# Altium PCB PM_TEST - copia.PcbDoc
Units mm, origin at the board's own origin, x right, y up, seen from the top; angles counter-clockwise.
Board outline 65 x 80.04 mm, 2 copper layers (Top Layer, Bottom Layer), stack 0.325 mm thick; 73 components, 44 nets, 205 pads, 217 vias.
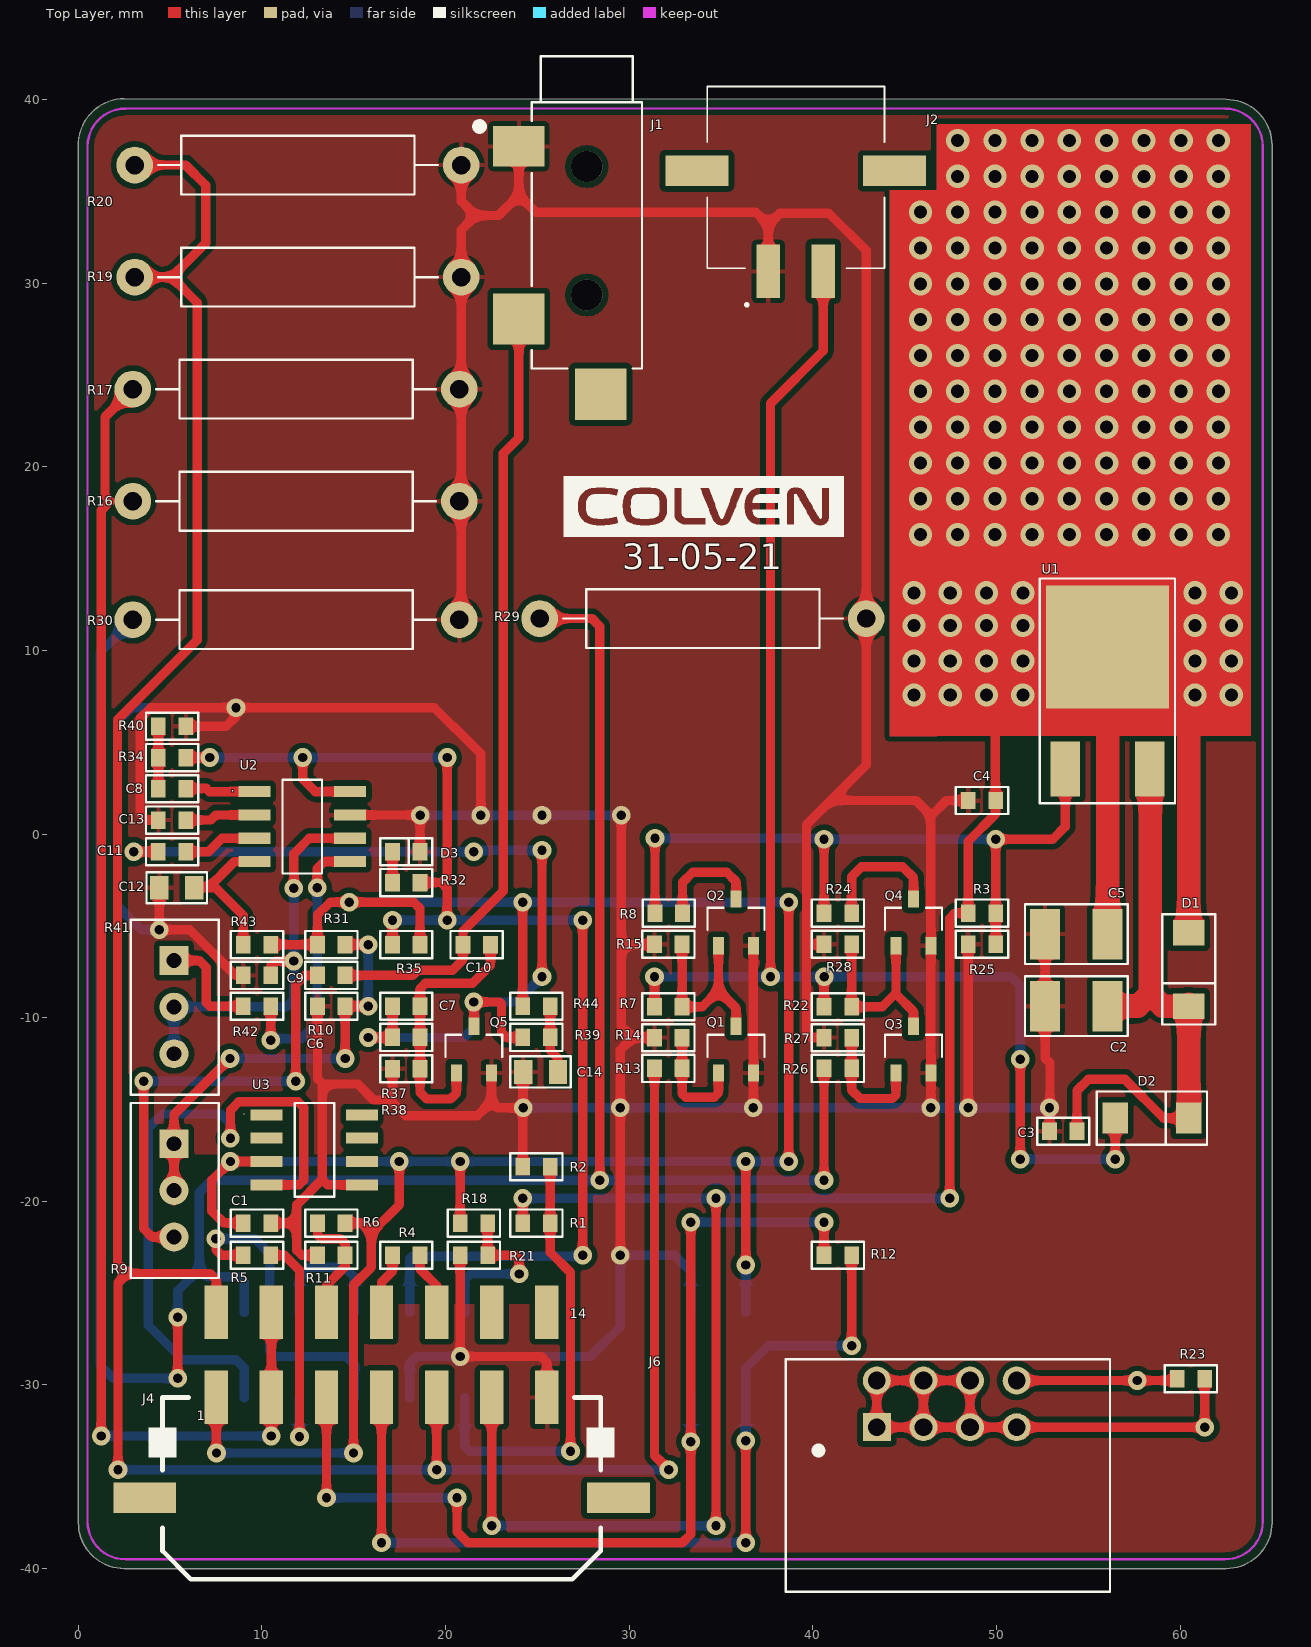
[diagram p0: Top Layer view]
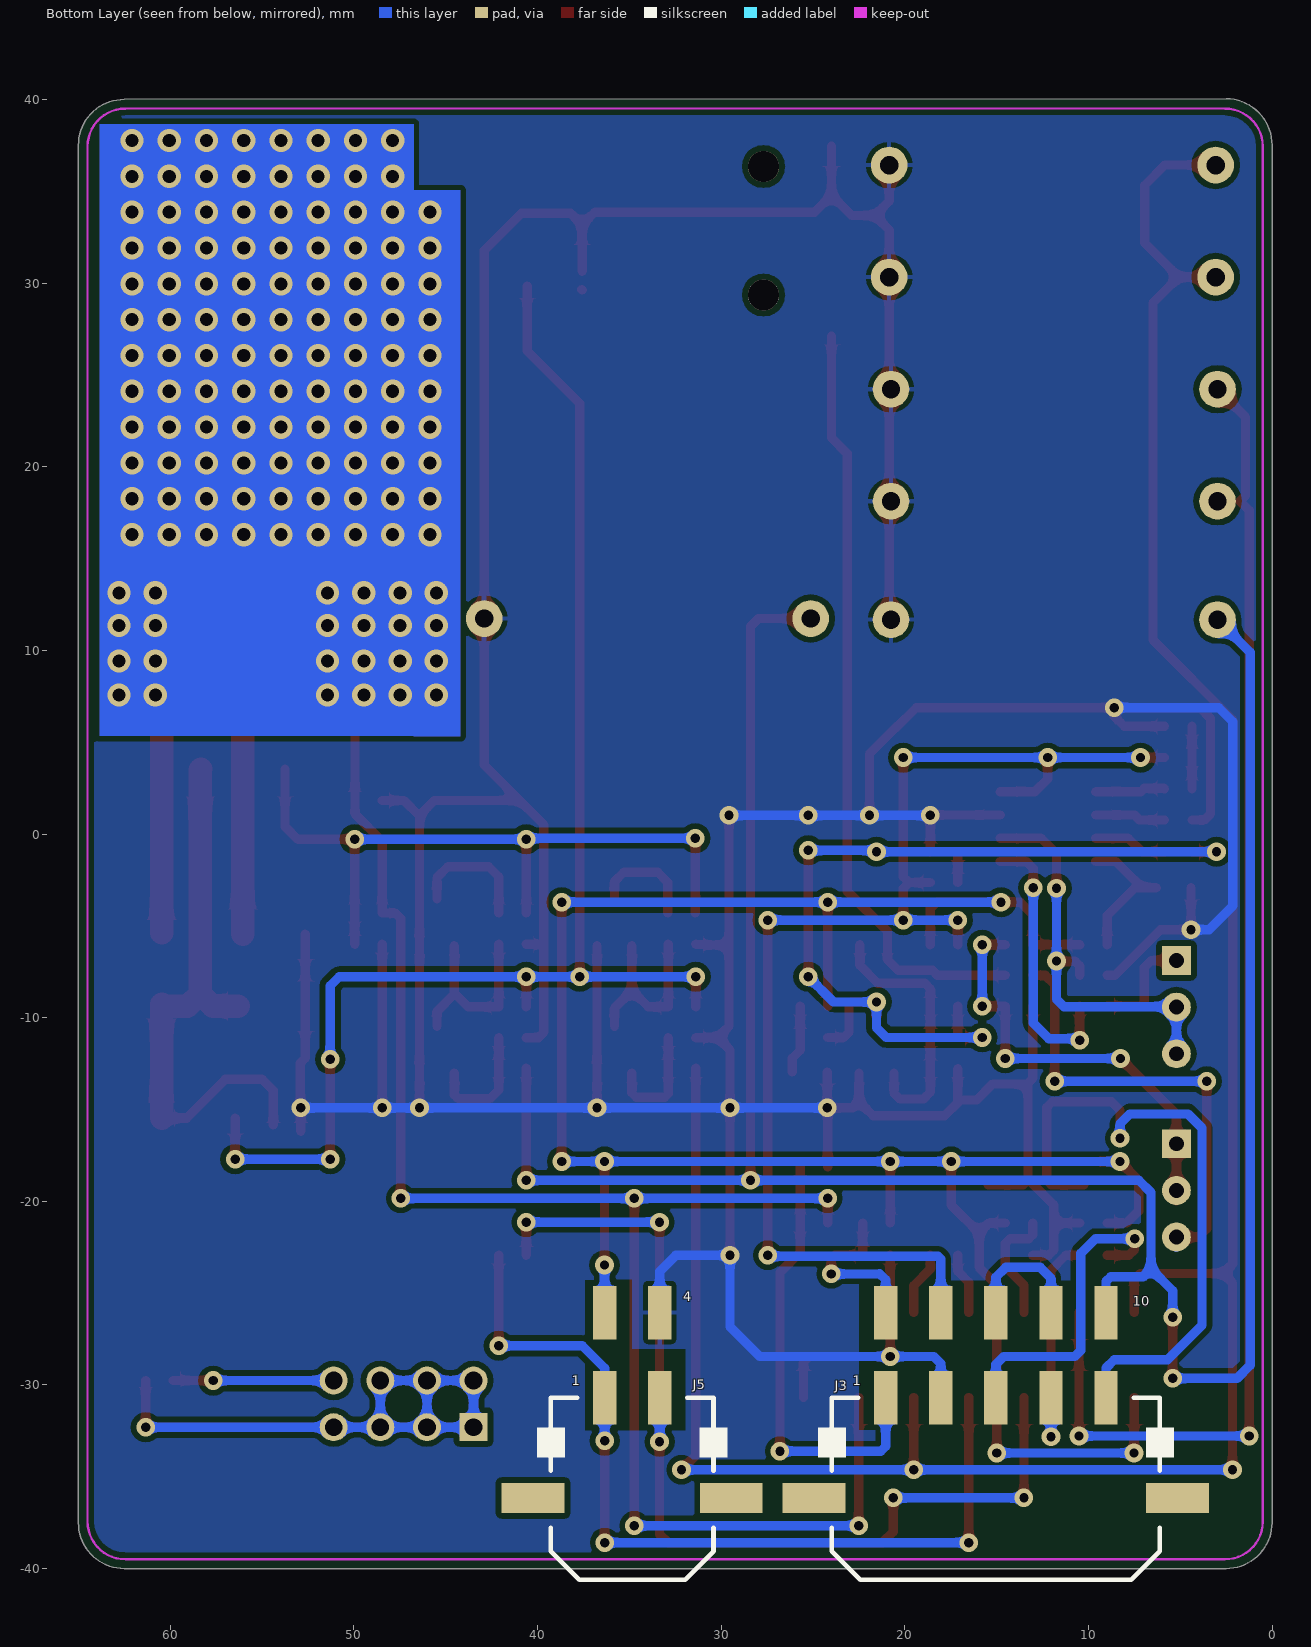
[diagram p1: Bottom Layer view, seen from below]

## Layer stack, top to bottom
Top Solder: solder mask 0.0102, Solder Resist, Dk 3.5
Top Layer: signal copper 0.0356
Dielectric 1: core 0.254, FR-4, Dk 4.2
Bottom Layer: signal copper 0.0356
Solder Side: solder mask 0.0102, Solder Resist, Dk 3.5

## Board outline
2.5,-39.995 cw(c2.5,-37.495) 0,-37.495 0,37.505 cw(c2.522,37.527) 2.5,40.05 62.5,40.005 cw(c62.5,37.505) 65,37.505 65,-37.495 cw(c62.5,-37.495) 62.5,-39.995

## Design rules (kind name [scope] priority, off if disabled: settings)
Clearance ClearancePWRA [OnLayer('PWRS')] p1: gap=0.381 ignorepadtopadclearanceinfootprint=FALSE except(0: Arc-Hole Track-Hole SMDPad-Hole THPad-Hole Via-Hole Fill-Hole Poly-Hole Region-Hole Text-Hole)
Clearance ClearancePours [InPolygon] p2: gap=0.305 ignorepadtopadclearanceinfootprint=FALSE except(0: Arc-Hole Track-Hole SMDPad-Hole THPad-Hole Via-Hole Fill-Hole Poly-Hole Region-Hole Text-Hole)
Clearance Ant2Gnd [InNet('ANT_GPS') Or InNet('ANT_GSM') Or InNet('RF_GPS') vs InNet('GND')] p3: gap=0.254 ignorepadtopadclearanceinfootprint=FALSE except(0: Arc-Hole Track-Hole SMDPad-Hole THPad-Hole Via-Hole Fill-Hole Poly-Hole Region-Hole Text-Hole)
Clearance [All] p4: gap=0.127 ignorepadtopadclearanceinfootprint=FALSE except(0: Arc-Hole Track-Hole SMDPad-Hole THPad-Hole Via-Hole Fill-Hole Poly-Hole Region-Hole Text-Hole)
ComponentClearance [All] p1: gap=0.2 collisioncheckmode=3 verticalgap=0.2 showdistances=FALSE
DiffPairsRouting [All] p1: maxlimit=0.508 minlimit=0.152 mostfreqgap=0.254 toplayer_minwidth=0.381 toplayer_maxwidth=0.381 toplayer_prefwidth=0.381 bottomlayer_minwidth=0.381 bottomlayer_maxwidth=0.381 bottomlayer_prefwidth=0.381 maxuncoupledlength=12.7
HoleSize [All] p1: absolutevalues=TRUE maxlimit=3.5 minlimit=0.025 maxpercent=80.000 minpercent=20.000
MinimumSolderMaskSliver LOGO_GESTYA [HasFootprint('LOGO_GESTYA_15mm_TOPSOLDER') or HasFootprint('HELLFISH_BOTTOMSOLDER')] p1: minsoldermaskwidth=0
MinimumSolderMaskSliver POWER33 [HasFootprint('POWER33')] p2: minsoldermaskwidth=0.025
MinimumSolderMaskSliver CASE_517AJ [HasFootprint('CASE_517AJ')] p3: minsoldermaskwidth=0.025
MinimumSolderMaskSliver LGA16 [HasFootprint('LGA16')] p4: minsoldermaskwidth=0.025
MinimumSolderMaskSliver [All] p5: minsoldermaskwidth=0.051
PlaneConnect IsVia [IsVia] p1: planeconnectstyle=Direct reliefexpansion=0.508 reliefentries=4 reliefconductorwidth=0.254 reliefairgap=0.254
PlaneConnect [All] p2: planeconnectstyle=Relief reliefexpansion=0.508 reliefentries=4 reliefconductorwidth=0.254 reliefairgap=0.254
PolygonConnect PolygonPadBat [HasFootprint('BHX1-1632-PC')] p1: connectstyle=Direct reliefconductorwidth=0.254 reliefentries=4 polygonreliefangle="90 Angle" airgapwidth=0.254
PolygonConnect Polygon2Via [IsVia] p2: connectstyle=Direct reliefconductorwidth=0.254 reliefentries=4 polygonreliefangle="90 Angle" airgapwidth=0.254
PolygonConnect PolygonPWRS [OnLayer('PWRS')] p3: connectstyle=Direct reliefconductorwidth=0.254 reliefentries=4 polygonreliefangle="90 Angle" airgapwidth=0.254
PolygonConnect PolygonVMAIN [InNet('VMAIN')] p4: connectstyle=Direct reliefconductorwidth=0.254 reliefentries=4 polygonreliefangle="90 Angle" airgapwidth=0.254
PolygonConnect PolygonVGPIO [All vs InNet('VGPIO')] p5: connectstyle=Direct reliefconductorwidth=0.254 reliefentries=4 polygonreliefangle="90 Angle" airgapwidth=0.254
PolygonConnect PolygonFuente [All vs InNet('NetC49_2') or InNet('5V_MAIN') or InNet('3V3_MCU')] p6: connectstyle=Direct reliefconductorwidth=0.254 reliefentries=4 polygonreliefangle="90 Angle" airgapwidth=0.254
PolygonConnect [All] p7: connectstyle=Relief reliefconductorwidth=0.254 reliefentries=4 polygonreliefangle="90 Angle" airgapwidth=0.254
RoutingVias [All] p1: holewidth=0.254 width=0.508 viastyle="Through Hole" minholewidth=0.254 minwidth=0.508 maxholewidth=0.254 maxwidth=0.508
ShortCircuit xL865 [HasFootprint('xL865') vs IsFill] p1: allowed=TRUE
ShortCircuit [All] p2: allowed=FALSE
SilkToSilkClearance [All] p1: silktosilkclearance=0.091
SilkToSolderMaskClearance SilkscreenOverComponentPads [IsPad] p1: minsilkscreentomaskgap=0.072 clearancetoexposedcopper=TRUE
SolderMaskExpansion [All] p1: expansion=0.102
Width [All] p1: maxlimit=1.27 minlimit=0.254 preferedwidth=0.508
Width PWRS [All] p2: maxlimit=1.524 minlimit=0.254 preferedwidth=1
Width Antenas [InNet('ANT_GPS') Or InNet('ANT_GSM') Or InNet('RF_GPS')] p3: maxlimit=0.889 minlimit=0.508 preferedwidth=0.889
22 further rules are at their usual default settings.

## Components (designator, comment, footprint, x,y, rotation, side; value= is the part's Value field where it differs from the comment)
C1 "100nF" 0603 9.728,-21.184 r0 top
C2 "10uF 50V" 1210 54.345,-9.373 r180 top
C3 "100nF" 0603 53.633,-16.182 r0 top
C4 "100nF" 0603 49.206,1.829 r0 top
C5 "10uF 50V" 1210 54.345,-5.451 r180 top
C6 "1uF 50V" 0603 13.775,-9.373 r0 top
C7 "100pF" 0603 17.856,-9.373 r180 top
C8 "1uF 50V" 0603 5.105,2.464 r0 top
C9 "100nF" 0603 9.728,-7.696 r180 top
C10 "10nF" 0603 21.692,-6.02 r0 top
C11 "1uF 50V" 0603 5.105,-0.965 r0 top
C12 "33uF 20V" 0805 5.359,-2.921 r0 top
C13 "220nF 16V" 0603 5.105,0.762 r180 top
C14 "10uF 10V" 0805 25.171,-12.954 r0 top
D1 "S1M" SMAK 60.464,-7.373 r270 top
D2 "S1M" SMAK 58.464,-15.469 r0 top
D3 "AZUL" LED0603_B 17.856,-0.965 r0 top
J1 "MJ-3523-SMT-TR" MJ-3523-SMT-TR 39.101,28.557 r90 top
J2 "MOLEX_0436500212" 0436500212 39.068,35.678 r180 top
J3 "MOLEX_043045-1009" 043045-1009 21.037,-30.688 r180 bottom locked
J4 "MOLEX_043045-1409" 043045-1409 7.51,-30.678 r0 top locked
J5 "MOLEX_043045-0409" 043045-0409 33.342,-30.688 r180 bottom locked
J6 "75867-132LF" 75867-132LF 43.477,-32.3 r0 top
Q1 "BC817" SOT23 35.809,-11.735 r0 top
Q2 "BC817" SOT23 35.809,-4.811 r0 top
Q3 "BC817" SOT23 45.475,-11.735 r0 top
Q4 "BC817" SOT23 45.475,-4.811 r0 top
Q5 "BC817" SOT23 21.539,-11.735 r0 top
R1 "100K 1%" 0603 24.943,-21.184 r180 top
R2 "100K 1%" 0603 24.943,-18.11 r0 top
R3 "240R 1%" 0603 49.206,-4.303 r180 top
R4 "10K 1%" 0603 17.856,-22.936 r180 top
R5 "10K 1%" 0603 9.728,-22.936 r180 top
R6 "100K 1%" 0603 13.775,-21.184 r0 top
R7 "10K 1%" 0603 32.126,-9.408 r0 top
R8 "13K3 1%" 0603 32.151,-4.303 r180 top
R9 "10K" 3386W 7.647,-14.641 r270 top
R10 "5K 0.1%" 0603 13.775,-7.696 r180 top
R11 "100K 1%" 0603 13.775,-22.936 r0 top
R12 "100R" 0603 41.356,-22.936 r0 top
R13 "10K 1%" 0603 32.126,-12.761 r180 top
R14 "10K 1%" 0603 32.126,-11.084 r180 top
R15 "10K 1%" 0603 32.126,-6.004 r180 top
R16 "120R 2W" RES700 20.748,18.124 r180 top
R17 "120R 2W" RES700 20.748,24.226 r180 top
R18 "100K 1%" 0603 21.539,-21.184 r180 top
R19 "120R 2W" RES700 20.848,30.328 r180 top
R20 "120R 2W" RES700 20.848,36.429 r180 top
R21 "100K 1%" 0603 21.539,-22.936 r0 top
R22 "10K 1%" 0603 41.356,-9.408 r0 top
R23 "10K 1%" 0603 60.583,-29.658 r180 top
R24 "3K 1%" 0603 41.356,-4.303 r180 top
R25 "6K49 1%" 0603 49.206,-6.004 r0 top
R26 "10K 1%" 0603 41.356,-12.761 r180 top
R27 "10K 1%" 0603 41.356,-11.084 r180 top
R28 "10K 1%" 0603 41.356,-6.004 r180 top
R29 "120R 2W" RES700 42.901,11.735 r180 top
R30 "120R 2W" RES700 20.748,11.675 r180 top
R31 "1K 1%" 0603 13.775,-6.02 r180 top
R32 "1K 1%" 0603 17.856,-2.642 r0 top
R34 "5K1 1%" 0603 5.105,4.166 r0 top
R35 "10K 1%" 0603 17.856,-6.02 r180 top
R37 "360K 1%" 0603 17.856,-11.074 r180 top
R38 "110K 1%" 0603 17.856,-12.776 r0 top
R39 "10K 1%" 0603 24.944,-11.074 r180 top
R40 "390R 1%" 0603 5.105,5.867 r180 top
R41 "10K" 3386W 7.647,-4.658 r270 top
R42 "5K1 1%" 0603 9.728,-9.373 r0 top
R43 "100R" 0603 9.728,-6.02 r0 top
R44 "1K 1%" 0603 24.944,-9.373 r0 top
U1 "LM317MBDTRKG" DPAK 53.746,3.535 r0 top
U2 "LM567C" SOIC8 12.192,0.406 r0 top
U3 "DS1822Z+T&R" SOIC8 12.852,-17.196 r0 top

## Footprints (in the part's own frame and the unit in brackets; to place one, negate y for a bottom-side part, rotate by r counter-clockwise, add the part's x,y. Pads: shape width x height; smd on the part's side, far side on the other; paste and mask are expansions set on the pad)
0603 [mm] "Chip Resistor, 2-Leads, Body 0,6\"x0,3\" - 1,6x0,9mm, IPC High Density"
  rect 0.8x0.95 smd: 1(-0.75,0) 2(0.75,0)
  silkscreen extent -1.42,-0.74 1.42,0.74, body extent -0.8,-0.41 0.8,0.39, height 0.44
0805 [mm] "Chip Resistor, 2-Leads, Body 0,8\"x0,5\" - 2,0x1,3mm, IPC High Density"
  rect 1x1.3 smd: 1(-0.95,0) 2(0.95,0)
  silkscreen extent -1.65,-0.85 1.65,0.85, body extent -1,-0.62 1,0.63, height 0.39
1210 [mil]
  rect 64x108 smd: 1(-67,0) 2(67,0)
  silkscreen extent -110,-64 110,64, body extent -64,-54 62,54, height 20
3386W [mil]
  rect 62x62 hole 32: 1(87.6,-96.06)
  round 62 hole 32: 2(187.6,-96.06) 3(287.6,-96.06)
  silkscreen extent 0,-189 375,0, body extent 1,-190 376,0, height 375
043045-0409 [mm]
  rect 3.43x1.65 smd: 0(-6.895,-5.47) 0(3.895,-5.47)
  rect 1.27x2.92 smd: 1(-3,0) 2(-3,4.63) 3(0,0) 4(0,4.63)
  silkscreen extent -6.68,-9.91 3.68,0, body extent -8.33,-10.06 5.32,5.34, height 8.83
043045-1009 [mm]
  rect 3.43x1.65 smd: 0(-3.895,-5.47) 0(15.895,-5.47)
  rect 1.27x2.92 smd: 1(0,0) 2(0,4.63) 3(3,0) 4(3,4.63) 5(6,0) 6(6,4.63) 7(9,0) 8(9,4.63) 9(12,0) 10(12,4.63)
  silkscreen extent -3.68,-9.91 15.68,0, body extent -5.32,-10.06 17.32,5.34, height 8.83
043045-1409 [mm]
  rect 3.43x1.65 smd: 0(-3.895,-5.47) 0(21.895,-5.47)
  rect 1.27x2.92 smd: 1(0,0) 2(0,4.63) 3(3,0) 4(3,4.63) 5(6,0) 6(6,4.63) 7(9,0) 8(9,4.63) 9(12,0) 10(12,4.63) 11(15,0) 12(15,4.63) 13(18,0) 14(18,4.63)
  silkscreen extent -3.68,-9.91 21.68,0, body extent -5.34,-10.07 23.31,5.33, height 8.73
75867-132LF [mil]
  rect 60x60 hole 38: 1(0,0)
  round 60 hole 38: 2(0,100) 3(100,0) 4(100,100) 5(200,0) 6(200,100) 7(300,0) 8(300,100)
  silkscreen extent -195,-352 500,146, body extent -189,-440 494,110, height 373
0436500212 [mm]
  rect 1.27x2.92 smd: 1(1.5,5.035) 2(-1.5,5.035)
  rect 3.43x1.65 smd: MP1(5.385,-0.435) MP2(-5.385,-0.435)
  silkscreen extent -4.82,-5.03 4.82,6.88, body extent -6.82,-5.08 6.83,5.66, height 5.64
DPAK [mm]
  rect 1.6x3 smd: 1(0,0) 3(4.6,0)
  rect 6.7x6.7 smd: 2(2.3,6.65)
  silkscreen extent -1.4,-1.85 5.97,10.38, body extent -0.98,-0.85 5.56,9.08, height 2.36
LED0603_B [mm]
  rect 0.8x0.95 smd: 1(-0.75,0) 2(0.75,0)
  silkscreen extent -1.42,-0.74 1.42,0.74, body extent -0.81,-0.41 0.81,0.39, height 0.6
MJ-3523-SMT-TR [mm] "MJ-3523-SMT-TR"
  rect 2.2x2.8 smd: 1(8.892,15.113)
  rect 2.8x2.8 smd: 2(-0.508,15.113) 10(-4.608,10.663)
  round 1.7 hole 1.7 unplated: ""(0.792,11.413) ""(7.792,11.413)
  silkscreen extent -3.21,8.41 13.79,17.46, body extent -5.18,8.38 13.82,15.87, height 5.1
RES700 [mm]
  round 2 hole 1: 1(0,0) 2(17.78,0)
  silkscreen extent 1.27,-1.6 16.51,1.6, body extent -0.4,-2.62 18.19,2.88, height 5.4
SMAK [mm]
  rect 1.4x1.7 smd: 1(-2,0) 2(2,0)
  silkscreen extent -3,-1.45 3,1.45, body extent -2.59,-1.3 2.61,1.3, height 2.4
SOIC8 [mm]
  rect 1.75x0.6 smd: 1(-2.6,1.905) 2(-2.6,0.635) 3(-2.6,-0.635) 4(-2.6,-1.905) 5(2.6,-1.905) 6(2.6,-0.635) 7(2.6,0.635) 8(2.6,1.905)
  silkscreen extent -1.07,-2.55 1.07,2.55, body extent -3.01,-2.51 3.01,2.49, height 1.75
SOT23 [mm]
  rect 0.6x0.95 smd: 1(-0.95,-1.275) 2(0,1.275) 3(0.95,-1.275)
  silkscreen extent -1.55,-0.4 1.55,0.8, body extent -1.48,-1.53 1.52,1.61, height 1

## Part data
C1 C3 C4 C9: library part CAP0603_100nF_X7R, "CAP0603 100nF 50V X7R", Supplier Part Number 1=490-4779-1-ND, APROBO=EB, CREO=CP, Part Number=CAP0603_100nF_X7R, Supplier 1=Digi-Key
C2 C5: library part CAP1210_10uF_50V_X5R, "CAP1210 10uF 50V X5R 20%", Manufacturer="Taiyo Yuden", Manufacturer Part Number=UMK325BJ106MM-T, Supplier Part Number 1=587-2225-1-ND, CREO=JP, Part Number=CAP1210_10uF_50V_X5R, Supplier 1=Digi-Key
C6 C8 C11: library part CAP0603_1uF_50V_X7R, "CAP0603 1uF 50V X7R", Supplier Part Number 1=587-3247-1-ND, CREO=EB, Part Number=CAP0603_1uF_50V_X7R, Supplier 1=Digi-Key
C7: library part CAP0603_100pF_NP0, "CAP0603 100pF 50V NP0", Manufacturer="Murata Electronics", Manufacturer Part Number=GRM1885C1H101JA01D, Supplier Part Number 1=490-1427-1-ND, CREO=EB, Part Number=CAP0603_100pF_NP0, Supplier 1=Digi-Key
C10: library part CAP0603_10nF_X7R, "CAP0603 10nF 50V X7R", Supplier Part Number 1=490-4778-1-ND, CREO=EB, Part Number=CAP0603_10nF_X7R, Supplier 1=Digi-Key
C12: library part CAP0805_33uF_10V_X5R, "CAP0805 33uF 10V X5R 20%", Manufacturer="TDK Corporation", Manufacturer Part Number=C2012X5R1A336M125AC, Supplier Part Number 1=445-8238-1-ND, CREO=JP, Part Number=CAP0805_33uF_10V_X5R, Supplier 1=Digi-Key
C13: library part CAP0603_220nF_16V_X7R, "CAP0603 220nF 16V X7R", Manufacturer="Murata Electronics", Manufacturer Part Number=GRM188R71C224KA01D, Supplier Part Number 1=490-3293-1-ND, CREO=EB, Part Number=CAP0603_220nF_16V_X7R, Supplier 1=Digi-Key
C14: library part CAP0805_10uF_10V_Y5V, "CAP0805 10uF 10V Y5V", Manufacturer="TDK Corporation", Manufacturer Part Number=C2012Y5V1A106Z, Supplier Part Number 1=445-1371-1-ND, CREO=EB, Part Number=CAP0805_10uF_10V_Y5V, Supplier 1=Digi-Key
D1 D2: library part DIO_GEN_PURPOSE_S1M_SMA, "DIODE GEN PURPOSE 1000V 1A SMAA", Supplier Part Number 1=S1MFSCT-ND, CREO=EB, Part Number=DIO_GEN_PURPOSE_S1M_SMA, Supplier 1=Digi-Key
D3: library part LED0603_AZUL, "LED AZUL 0603", CREO=EB, Part Number=LED0603_AZUL
J1: "CONN JACK MONO 3.5MM SMD", Manufacturer="CUI Devices", Supplier Part Number 1=CP-3523MJCT-ND, Manufacturer Part Number=MJ-3523-SMT-TR, Part Number=MJ-3523-SMT-TR, Publico=JP, Supplier 1=Digi-Key
J2: "MICROFIT SMD R/A 2POS 3MM", Arrow Part Number=0436500212, Manufacturer=Molex, Supplier Part Number 1=WM1890CT-ND, Arrow Price/Stock=https://www.arrow.com/en/products/0436500212/molex, Datasheet Link=https://www.molex.com/pdm_docs/sd/436500212_sd.pdf, Height=5.57mm, Manufacturer_Name=Molex, Manufacturer_Part_Number=0436500212, Manufacturer Part Number=0436500212, Part Number=MOLEX_0436500212, Publico=JP, Supplier 1=Digi-Key
J3: library part MOLEX_043045_HEADER_10POS, "CONN HEADER SMD R/A 10POS 3MM", Manufacturer="Molex, LLC", Manufacturer Part Number=0430451009, Supplier Part Number 1=WM1829CT-ND, APROBO=-, Part Number=MOLEX_043045_HEADER_10POS, Publico=MM, Supplier 1=Digi-Key
J4: library part MOLEX_043045_HEADER_14POS, "HEADER R/A SMD DR TIN 14 CKT", Manufacturer="Molex, LLC", Manufacturer Part Number=0430451409, Supplier Part Number 1=WM3257CT-ND, APROBO=-, Part Number=MOLEX_043045_HEADER_14POS, Publico=MM, Supplier 1=Digi-Key
J5: library part MOLEX_043045_HEADER_4POS, "CONN HEADER SMD R/A 4POS 3MM", Manufacturer="Molex, LLC", Manufacturer Part Number=0430450409, Supplier Part Number 1=WM1826CT-ND, APROBO=-, Part Number=MOLEX_043045_HEADER_4POS, Publico=MM, Supplier 1=Digi-Key
J6: library part IDC8_75867-132LF, "CONN HEADER R/A 8POS 2.54MM", Manufacturer="Amphenol ICC (FCI)", APROBO=-, Manufacturer Part Number=75867-132LF, Part Number=IDC8_75867-132LF, Publico=JP, Supplier 1=Digi-Key, Supplier Part Number 1=75867-132LF
Q1 Q2 Q3 Q4 Q5: library part BC817_SOT23, "TRANSISTOR NPN 500MA 45V SOT323", Manufacturer="ON Semiconductor", Manufacturer Part Number=BC81740MTF, Supplier Part Number 1=BC81740MTFCT-ND, APROBO=-, Part Number=BC817_SOT23, Publico=EB, Supplier 1=Digi-Key
R1 R2 R6 R11 R18 R21: library part RES0603_100K_1%, "RES0603 100K 1%", Manufacturer="Stackpole Electronics Inc", Manufacturer Part Number=RMCF0603FG100K, Supplier Part Number 1=RMCF0603FG100KCT-ND, APROBO=-, Part Number=RES0603_100K_1%, Publico=JP, Supplier 1=Digi-Key
R3: library part RES0603_240R_1%, "RES0603 240R 1/10W 1%", Manufacturer="Stackpole Electronics IncRMCF0603FT13K3", Manufacturer Part Number=RMCF0603FT240R, Part Number=RES0603_240R_1%
R4 R5 R7 R13 R14 R15 R22 R23 R26 R27 R28 R35 R39: library part RES0603_10K_1%, "RES0603 10K 1%", Supplier Part Number 1=RMCF0603FT10K0CT-ND, APROBO=-, Part Number=RES0603_10K_1%, Publico=JP, Supplier 1=Digi-Key
R8: library part RES0603_13K3_1%, "RES0603 13K3 1/10W 1%", Manufacturer="Stackpole Electronics IncRMCF0603FT13K3", Manufacturer Part Number=RMCF0603FT13K3, Supplier Part Number 1=RMCF0603FT13K3CT-ND, Part Number=RES0603_13K3_1%, Publico=JP, Supplier 1=Digi-Key
R9 R41: library part TRIMMER_3386W_10K, "3386W TRIMMER 10K OHM 0.5W PC PIN", Manufacturer="Bourns Inc.", Manufacturer Part Number=3386W-1-103LF, Supplier Part Number 1=3386W-103LF-ND, APROBO=-, Part Number=TRIMMER_3386W_10K, Publico=EB, Supplier 1=Digi-Key
R10: library part RES0603_5K_0.1%, "RES0603 5K 1/10W 0.1%", Manufacturer=Yageo, Manufacturer Part Number=RT0603BRE075KL, Supplier Part Number 1=13-RT0603BRE075KLCT-ND, Part Number=RES0603_5K_0.1%, Publico=JP, Supplier 1=Digi-Key
R12 R43: library part RES0603_100R_5%, "RES0603 100R 5%", Supplier Part Number 1=RMCF0603JT100RCT-ND, APROBO=-, Part Number=RES0603_100R_5%, Publico=EB, Supplier 1=Digi-Key
R16 R17 R19 R20 R29 R30: library part RES700_120R_5%_2W, "RES 120 OHM 2W 5% AXIAL", Manufacturer="Vishay Beyschlag/Draloric/BC Components", Manufacturer Part Number=PR02000201200JA100, Supplier Part Number 1=BC4760CT-ND, Part Number=RES700_120R_5%_2W, Publico=JP, Supplier 1=Digi-Key
R24: library part RES0603_3K_1%, "RES0603 3K 1/10W 1%", Manufacturer="Stackpole Electronics Inc", Manufacturer Part Number=RMCF0603FT3K00, Supplier Part Number 1=RMCF0603FT3K00CT-ND, Part Number=RES0603_3K_1%, Publico=JP, Supplier 1=Digi-Key
R25: library part RES0603_6K49_1%, "RES0603 6K49 1/10W 1%", Manufacturer="Stackpole Electronics Inc", Manufacturer Part Number=RMCF0603FT6K49, Supplier Part Number 1=RMCF0603FT6K49CT-ND, Part Number=RES0603_6K49_1%, Publico=JP, Supplier 1=Digi-Key
R31 R32 R44: library part RES0603_1K_1%, "RES0603 1K 1%", Manufacturer="Stackpole Electronics Inc", Manufacturer Part Number=RMCF0603FT1K00, Supplier Part Number 1=RMCF0603FT1K00CT-ND, APROBO=-, Part Number=RES0603_1K_1%, Publico=EB, Supplier 1=Digi-Key
R34 R42: library part RES0603_5K1_1%, "RES 5.1K 1% 1/10W 0603", Manufacturer="Stackpole Electronics Inc", Manufacturer Part Number=RMCF0603FT5K10, Supplier Part Number 1=RMCF0603FT5K10CT-ND, APROBO=-, Part Number=RES0603_5K1_1%, Publico=JP, Supplier 1=Digi-Key
R37: library part RES0603_360K_1%, "RES0603 360K 1/10W 1%", Manufacturer="Stackpole Electronics Inc", Manufacturer Part Number=RMCF0603FT360K, Supplier Part Number 1=738-RMCF0603FT360KCT-ND, Part Number=RES0603_360K_1%, Publico=JP, Supplier 1=Digi-Key
R38: library part RES0603_110K_1%, "RES0603 110K 1%", Manufacturer="Stackpole Electronics Inc", Manufacturer Part Number=RMCF0603FT110K, Supplier Part Number 1=RMCF0603FT110KCT-ND, APROBO=-, Part Number=RES0603_110K_1%, Publico=EB, Supplier 1=Digi-Key
R40: library part RES0603_390R_1%, "RES0402 390R 1/10W 1%", Manufacturer="Stackpole Electronics Inc", Manufacturer Part Number=RMCF0603FT390R, Supplier Part Number 1=RMCF0603FT390RCT-ND, APROBO=-, Part Number=RES0603_390R_1%, Publico=JP, Supplier 1=Digi-Key
U1: library part LM317MBDTRKG_DPAK, "Linear Voltage Regulator IC Positive Adjustable Output 500mA DPAK", Manufacturer="ON Semiconductor", Supplier Part Number 1=LM317MBDTRKGOSCT-ND, Manufacturer Part Number=LM317MBDTRKG, Part Number=LM317MBDTRKG_DPAK, Publico=JP, Supplier 1=Digi-Key
U2: "Telecom IC Tone Decoder 8-SOIC", Manufacturer="Texas Instruments", Manufacturer Part Number=LM567CMX/NOPB, Supplier Part Number 1=296-38556-1-ND, Part Number=LM567C, Publico=JP, Supplier 1=Digi-Key
U3: library part DS1822Z+T&R_SOIC8, "Temperature Sensor Digital, Local -55°C ~ 125°C 11 b 8-SOIC", Manufacturer="Maxim Integrated", Supplier Part Number 1=DS1822Z+CT-ND, Manufacturer Part Number=DS1822Z+T&R, Part Number=DS1822Z+T&R_SOIC8, Publico=JP, Supplier 1=Digi-Key

## Via types
v1: diameter 1.27, hole 0.711, Top Layer to Bottom Layer, tented both sides, 130 vias
v2: diameter 1.016, hole 0.508, Top Layer to Bottom Layer, tented both sides, 87 vias

## Nets (pads, with @x,y where several pads share a name; then routed paths per layer and width w, separated by ;. In a path a pad name is that pad's centre, name@x,y a point inside that pad or via, vN(x,y) a via of type N, cw(c..) or ccw(c..) an arc to the next point about the centre after c; other vN are vias at no path point)
5V_PROT: C1.1 J4.1 J5.2 R6.2 R18.2 R31.2 R35.1 R43.2 R44.1 U3.3 | length 134.1
  Top Layer w0.508: v2@7.493,-33.706 7.51,-33.688 J4.1 ; C1.1 7.925,-21.184 7.264,-20.523 7.264,-18.847 v2(8.28,-17.831) U3.3@10.236,-17.831 ; R43.2 R31.2 13.025,-4.4 13.716,-3.708 v2(14.757,-3.708) 18.263,-3.708 18.606,-4.052 R35.1 ; R6.2 15.418,-21.184 15.951,-21.717 ; v2@14.986,-33.655 14.986,-24.562 15.951,-23.597 15.951,-21.717 ; v2(17.475,-17.831) 17.475,-20.193 15.951,-21.717 ; R18.2 v2(20.789,-17.831) ; R44.1 v2(24.194,-3.708) ; v2(36.347,-23.47) v2(36.347,-17.831) ; v2@38.684,-18.009 v2(38.684,-17.831) v2(38.684,-3.708)
  Bottom Layer w0.508: v2@7.493,-33.706 v2(7.518,-33.706) v2(14.986,-33.706) v2@14.986,-33.655 ; v2(8.28,-17.831) v2(17.475,-17.831) v2(20.789,-17.831) v2@36.22,-17.831 ; v2(14.757,-3.708) v2(24.194,-3.708) v2(38.684,-3.708) v2@38.71,-3.708 ; J5.2 36.342,-23.475 v2(36.347,-23.47) ; v2(36.347,-17.831) v2(38.684,-17.831)
GND: C1.2 C2.2 C3.1 C4.1 C5.2 C6.1 C9.2 C12.1 C13.2 C14.1 D3.2 J1.1 J2.1 J3.3 J4.13 J5.4 Q1.3 Q2.3 Q3.3 Q4.3 Q5.3 R2.1 R11.1 R14.2 R15.2 R16.1 R17.1 R19.1 R20.1 R21.1 R25.1 R27.2 R28.2 R29.1 R30.1 R38.1 R40.1 U2.7 U3.5 | length 362.5
  Top Layer w0.508: C13.2 3.683,0.762 3.353,1.092 3.353,6.299 3.937,6.883 v2(8.585,6.883) ; C12.1 v2(4.409,-5.207) 6.071,-5.207 8.56,-7.696 C9.2 ; R40.1 8.052,5.867 8.585,6.401 v2(8.585,6.883) ; C1.2 11.887,-21.184 ; R11.1 12.167,-22.936 11.887,-22.657 11.887,-21.184 ; C6.1 13.025,-13.304 13.284,-13.564 13.284,-13.614 ; U2.7 18.593,1.041 v2(18.618,1.016) 18.606,1.004 D3.2 ; U3.5 13.564,-19.101 13.271,-18.809 ; R38.1 17.106,-14.478 ; 20.422,5.867 21.92,4.369 v2(21.92,1.016) ; 20.472,5.791 19.38,6.883 v2(8.585,6.883) ; R30.1 20.848,11.775 R19.1 20.848,32.893 21.636,33.68 ; R21.1 v2(20.789,-28.448) 25.197,-28.448 25.51,-28.762 J4.13 ; R20.1 20.848,34.468 21.636,33.68 ; Q5.3 22.489,-14.569 ; J1.1 23.988,34.787 ; v2@24.181,-14.91 22.83,-14.91 22.489,-14.569 ; R2.1 24.196,-18.107 v2@24.196,-15.072 ; v2(24.221,-14.91) C14.1 ; v2(29.515,-22.936) v2(29.515,-14.91) 29.515,-11.76 30.191,-11.084 ; v2(29.566,1.016) 29.566,-6.081 ; R14.2 30.191,-11.084 ; R15.2 29.566,-6.081 ; v2(36.759,-14.91) Q1.3 Q2.3 ; J2.1@37.568,29.627 J2.1@37.592,29.65 ; J2.1 37.568,33.174 ; R27.2 39.939,-11.084 39.649,-10.795 39.649,-6.096 ; R28.2 39.741,-6.004 39.649,-6.096 ; v2(46.425,-14.91) Q3.3 Q4.3 46.425,1.022 ; 46.425,1.067 46.425,1.022 ; v2(48.456,-14.91) R25.1 ; C4.1 47.269,1.829 46.444,1.003 46.425,1.022 ; C5.2 C2.2 52.643,-12.206 52.908,-12.471 52.908,-14.884 v2(52.883,-14.91) C3.1 ; 11.887,-21.184 11.887,-20.193 13.271,-18.809 ; 13.271,-18.809 13.284,-18.796 13.284,-13.614 ; 13.284,-13.614 15.215,-13.614 16.078,-14.478 17.106,-14.478 ; 17.106,-14.478 17.106,-14.617 17.831,-15.342 21.717,-15.342 22.489,-14.569 ; 21.636,33.68 22.881,33.68 23.988,34.787 ; 23.988,34.787 24.917,33.858 36.884,33.858 37.568,33.174 ; 29.566,-6.081 29.566,-10.459 30.191,-11.084 ; 37.568,33.174 38.202,33.807 40.869,33.807 42.901,31.775 R29.1 42.901,3.759 40.97,1.829 ; 39.649,-6.096 39.649,0.508 40.97,1.829 ; 40.97,1.829 45.618,1.829 46.425,1.022
  Bottom Layer w0.508: v2(4.409,-5.207) 3.429,-5.207 2.134,-3.912 2.134,6.121 2.896,6.883 v2(8.585,6.883) ; J3.3 18.037,-28.826 18.415,-28.448 v2(20.789,-28.448) 27.889,-28.448 29.515,-26.822 v2(29.515,-22.936) 32.461,-22.936 33.342,-23.817 J5.4 ; v2(18.618,1.016) v2(21.92,1.016) v2(25.248,1.016) v2(29.566,1.016) ; v2(24.221,-14.91) v2(29.515,-14.91) v2(36.759,-14.91) v2(46.425,-14.91) v2(48.456,-14.91) v2(52.883,-14.91)
NetC2_1: C2.1 C3.2 D1.2 D2.2 U1.3 | length 32.3
  Top Layer w0.508: C3.2@54.383,-15.838 54.383,-13.969 54.991,-13.36 56.998,-13.36 59.106,-15.469 D2.2
  Top Layer w1.27: C2.1@56.286,-9.373 57.683,-9.373 58.369,-8.687 ; U1.3@58.344,3.535 58.369,3.51 58.369,-8.687 ; D2.2 D1.2 ; D1.2@60.464,-9.271 D1.2 ; 58.369,-8.687 59.055,-9.373 D1.2
NetC6_2: C6.2 R9.1 R9.2 R31.1 | length 23.6
  Top Layer w0.508: R9.2@5.207,-19.964 R9.2 R9.1 5.207,-15.265 v2(8.255,-12.217) ; R31.1 v2(15.778,-6.02) ; v2@14.529,-11.862 14.525,-11.858 C6.2 v2(15.778,-9.373)
  Bottom Layer w0.508: v2(8.255,-12.217) v2(14.529,-12.217) ; v2(15.778,-9.373) v2(15.778,-6.02)
NetC7_1: C7.1 C10.2 Q5.1 R37.1 R38.2 | length 14.5
  Top Layer w0.508: Q5.1 20.589,-14.107 20.269,-14.427 18.974,-14.427 18.606,-14.06 R38.2 18.606,-8.419 18.898,-8.128 21.463,-8.128 22.442,-7.149 C10.2
NetC7_2: C7.2 C11.1 Q5.2 R37.2 R39.2 | length 50.3
  Top Layer w0.508: v2@3.429,-0.965 C11.1 ; v2@15.697,-11.074 v2(15.778,-11.074) R37.2 C7.2 ; Q5.2 v2(21.539,-9.144) ; v2@21.539,-8.915 v2(21.539,-9.144) ; R39.2 23.317,-11.074 23.038,-10.795 23.038,-9.246 22.936,-9.144 v2(21.539,-9.144) ; v2(25.248,-7.772) v2(25.248,-0.889)
  Bottom Layer w0.508: v2@3.429,-0.965 v2(21.539,-0.965) 21.615,-0.889 v2(25.248,-0.889) ; v2(15.778,-11.074) 21.006,-11.074 21.539,-10.541 v2(21.539,-9.144) 23.876,-9.144 v2(25.248,-7.772)
  other v2: 3.023,-0.965
NetC8_1: C8.1 R34.1 R40.2 | length 3.4
  Top Layer w0.508: C8.1 R40.2
NetC8_2: C8.2 U2.1 | length 3.8
  Top Layer w0.508: C8.2 5.881,2.489 6.96,2.489 7.137,2.311 U2.1
NetC9_1: C9.1 R41.2 R41.3 U2.6 | length 22.7
  Top Layer w0.508: C9.1 10.478,-7.175 10.719,-6.934 11.711,-6.934 v2(11.736,-6.909) ; v2(11.736,-2.948) 11.736,-1.065 12.573,-0.229 U2.6
  Bottom Layer w0.508: R41.3 R41.2@5.207,-9.982 ; R41.2 R41.2@5.207,-9.982 ; v2(11.736,-2.948) v2(11.736,-6.909) 11.736,-8.99 11.328,-9.398 5.791,-9.398 R41.2@5.207,-9.982
NetC10_1: C10.1 J1.2 R10.1 | length 42
  Top Layer w0.508: R10.1 18.212,-7.696 18.491,-7.417 20.371,-7.417 20.942,-6.846 C10.1 20.942,-5.297 23.139,-3.099 23.139,20.726 23.988,21.575 J1.2@23.988,27.109
NetC11_2: C11.2 U2.3 | length 4
  Top Layer w0.508: C11.2 7.087,-0.965 7.823,-0.229 U2.3
NetC12_2: C12.2 R43.1 U2.4 | length 8
  Top Layer w0.508: C12.2 7.087,-2.921 ; R43.1 8.978,-4.432 7.468,-2.921 7.087,-2.921 ; U2.4 8.509,-1.499 7.087,-2.921
NetC13_1: C13.1 U2.2 | length 3.9
  Top Layer w0.508: C13.1 7.214,0.762 7.493,1.041 U2.2
NetC14_2: C14.2 R39.1 R44.2 | length 3.8
  Top Layer w0.508: R44.2 R39.1 25.694,-11.775 26.121,-12.202 C14.2
NetD3_1: D3.1 R32.1 | length 1.7
  Top Layer w0.508: R32.1 D3.1
NetJ3_1: J3.1 R1.1 R2.2 | length 24.5
  Top Layer w0.508: R2.2 R1.1 25.693,-22.772 26.797,-23.876 v2(26.797,-33.604)
  Bottom Layer w0.508: J3.1 21.037,-33.331 21.311,-33.604 v2(26.797,-33.604)
NetJ3_2: J3.2 R18.1 R21.2 | length 9.3
  Top Layer w0.508: R18.1 R21.2 23.8,-22.936 24.003,-23.139 v2(24.003,-23.952)
  Bottom Layer w0.508: J3.2 21.037,-24.276 21.377,-23.936 21.393,-23.952 v2(24.003,-23.952)
NetJ3_4: J3.4 R32.2 R34.2 R35.2 U2.8 | length 70.8
  Top Layer w0.508: R34.2 v2(7.163,4.166) ; v2(12.217,4.166) 12.217,2.997 12.903,2.311 U2.8 ; R35.2 v2@17.106,-4.787 ; R32.2 19.761,-2.642 ; v2(20.079,-4.686) 20.079,-2.96 19.761,-2.642 ; v2(20.079,4.166) 20.079,-2.323 19.761,-2.642 ; v2@20.098,4.166 v2@20.117,4.166 ; v2(27.457,-22.936) v2(27.457,-4.686)
  Bottom Layer w0.508: v2(7.163,4.166) v2(12.217,4.166) v2(20.079,4.166) ; v2(17.106,-4.686) v2(20.079,-4.686) v2(27.457,-4.686) ; J3.4 18.037,-23.139 18.19,-22.987 27.381,-22.987 v2@27.432,-22.936 ; v2@27.457,-22.962 v2@27.432,-22.936 ; v2(27.457,-22.936) v2@27.432,-22.936
NetJ3_5: J3.5 R5.2 | length 17.5
  Top Layer w0.508: v2@7.493,-22.022 7.493,-22.631 7.798,-22.936 R5.2
  Bottom Layer w0.508: v2@7.493,-22.022 v2(7.48,-22.034) 9.588,-22.034 9.601,-22.022 10.414,-22.835 10.414,-28.118 10.744,-28.448 14.605,-28.448 15.037,-28.88 J3.5
NetJ3_6: J3.6 J3.8 | length 7.3
  Bottom Layer w0.508: J3.8 12.037,-24.183 12.624,-23.597 14.503,-23.597 15.037,-24.13 J3.6
NetJ3_7: J3.7 R5.1 | length 13.1
  Top Layer w0.508: R5.1 11.227,-22.936 12.04,-23.749 12.04,-32.741 v2@12.116,-32.817
  Bottom Layer w0.508: J3.7 12.037,-32.814 v2(12.04,-32.817)
NetJ3_9: J3.9 U3.4 | length 36.3
  Top Layer w0.508: v2(8.28,-16.561) 8.28,-15.037 8.738,-14.58 11.963,-14.58 12.268,-14.884 12.268,-18.847 12.014,-19.101 U3.4
  Bottom Layer w0.508: v2@8.077,-16.561 8.28,-16.358 8.28,-15.773 7.747,-15.24 4.572,-15.24 3.81,-16.002 3.81,-26.746 5.69,-28.626 8.585,-28.626 9.037,-29.078 J3.9
NetJ3_10: J3.10 R26.2 R29.2 R30.2 | length 134.9
  Top Layer w0.508: v2(5.41,-29.642) v2(5.41,-26.314) ; R29.2 27.965,11.735 28.397,11.303 v2(28.397,-18.855) ; v2(40.606,-18.855) R26.2
  Bottom Layer w0.508: R30.2 1.194,9.901 1.194,-28.931 1.905,-29.642 v2(5.41,-29.642) ; v2(5.41,-26.314) 5.41,-24.867 6.591,-23.685 ; J3.10 9.037,-24.353 8.788,-24.105 7.01,-24.105 6.591,-23.685 ; v2(40.606,-18.855) v2(28.397,-18.855) 7.256,-18.855 6.591,-19.52 6.591,-23.685
NetJ4_2: J4.2 J4.9 R13.2 R19.2 R20.2 | length 142.7
  Top Layer w0.508: v2(2.156,-34.62) 2.156,-24.438 2.667,-23.927 ; R19.2 5.08,30.328 ; R20.2 5.836,36.429 6.934,35.331 6.934,32.182 5.08,30.328 ; J4.2 7.51,-24.274 7.163,-23.927 2.667,-23.927 ; v2(19.51,-34.617) J4.9 ; R13.2 31.376,-33.836 v2(32.156,-34.617) ; 2.667,-23.927 2.134,-23.393 2.134,6.223 6.477,10.566 6.477,28.931 5.08,30.328
  Bottom Layer w0.508: v2@2.156,-34.617 v2(19.51,-34.617) v2(32.156,-34.617)
NetJ4_3: J4.3 J4.4 R16.2 R17.2 | length 74
  Top Layer w0.508: v2(1.241,-32.778) 1.241,17.624 1.741,18.124 1.448,18.418 1.448,22.706 R17.2 ; v2(10.51,-32.778) J4.3 J4.4
  Bottom Layer w0.508: v2(1.241,-32.778) v2(10.51,-32.778)
NetJ4_5: J4.5 J5.3 R12.1 | length 56.1
  Top Layer w0.508: v2(13.51,-36.147) J4.5 ; v2(20.622,-36.147) 20.622,-37.996 21.209,-38.583 32.893,-38.583 33.35,-38.125 v2(33.35,-33.096) v2(33.35,-21.133) ; R12.1 v2(40.606,-21.133)
  Bottom Layer w0.508: v2(13.51,-36.147) v2(20.622,-36.147) ; J5.3 33.342,-33.088 v2(33.35,-33.096) ; v2(33.35,-21.133) v2(40.606,-21.133)
NetJ4_6: J4.6 R6.1 R11.2 | length 6.5
  Top Layer w0.508: R6.1 13.025,-21.813 13.251,-22.04 14.267,-22.04 14.525,-22.297 R11.2 14.525,-23.55 13.51,-24.564 J4.6
NetJ4_7: J4.7 J5.1 R12.2 | length 48.2
  Top Layer w0.508: v2(16.51,-38.583) J4.7 ; v2(36.342,-38.583) v2(36.342,-33.04) ; v2(42.106,-27.864) R12.2
  Bottom Layer w0.508: v2(16.51,-38.583) v2(36.342,-38.583) v2@36.398,-38.583 ; v2@36.342,-33.045 v2(36.342,-33.04) J5.1 36.342,-29.088 37.567,-27.864 v2@41.859,-27.864
NetJ4_8: J4.8 R4.2 | length 3.4
  Top Layer w0.508: J4.8 16.51,-24.409 17.106,-23.813 R4.2
NetJ4_10: J4.10 R4.1 | length 3.5
  Top Layer w0.508: R4.1 18.606,-23.686 19.51,-24.59 J4.10
NetJ6_1: J6.1 J6.2 J6.3 J6.4 J6.5 J6.6 J6.7 R23.1 | length 63.7
  Top Layer w0.508: R23.1@61.333,-29.76 v2(61.333,-32.3) J6.7 J6.5 ; J6.3 J6.4 ; J6.3 J6.5 ; J6.3 J6.1 J6.2 J6.4 ; J6.4 J6.6 J6.5
  Bottom Layer w0.508: v2(61.333,-32.3) J6.7 J6.5 ; J6.3 J6.1 J6.2 J6.4 ; J6.3 J6.5 ; J6.3 J6.4 ; J6.4 J6.6 J6.5
NetJ6_8: J6.8 R23.2 | length 15.3
  Top Layer w0.508: J6.8 v2(57.658,-29.76) R23.2@59.833,-29.76
  Bottom Layer w0.508: J6.8 v2(57.658,-29.76)
NetQ1_1: Q1.1 R13.1 R14.1 | length 6.3
  Top Layer w0.508: R14.1 R13.1 32.876,-14.131 33.071,-14.326 34.62,-14.326 34.859,-14.087 Q1.1
NetQ1_2: Q1.2 Q2.1 R7.2 R15.1 | length 10.5
  Top Layer w0.508: R15.1 R7.2 33.97,-9.408 34.859,-8.519 ; Q2.1 34.859,-8.519 ; Q1.2 35.809,-9.469 34.859,-8.519
NetQ2_2: Q2.2 R8.1 | length 6
  Top Layer w0.508: R8.1 32.901,-2.633 33.452,-2.083 35.306,-2.083 35.809,-2.586 Q2.2
NetQ3_1: Q3.1 R26.1 R27.1 | length 6.7
  Top Layer w0.508: R27.1 R26.1 42.106,-13.938 42.57,-14.402 44.323,-14.402 44.525,-14.2 Q3.1
NetQ3_2: Q3.2 Q4.1 R22.2 R28.1 | length 10.9
  Top Layer w0.508: R28.1 R22.2 43.78,-9.408 44.463,-8.725 ; Q4.1 44.525,-8.663 44.463,-8.725 ; Q3.2 45.475,-9.661 44.539,-8.725 44.463,-8.725
NetQ4_2: Q4.2 R24.1 | length 7
  Top Layer w0.508: R24.1 42.106,-2.318 42.647,-1.778 44.882,-1.778 45.475,-2.371 Q4.2
NetR3_1: R3.1 R8.2 R24.2 R25.2 U1.1 | length 39.6
  Top Layer w0.508: R8.2 v2(31.401,-0.229) ; R24.2 v2(40.606,-0.279) ; R25.2 R3.1 v2(49.956,-0.279) 53.061,-0.279 53.746,0.406 U1.1
  Bottom Layer w0.508: v2(31.401,-0.229) 40.556,-0.229 v2(40.606,-0.279) v2(49.956,-0.279)
NetR9_3: R9.3 R10.2 | length 25.4
  Top Layer w0.508: v2@3.556,-13.437 v2(3.556,-13.462) 3.556,-21.488 4.013,-21.946 R9.3 ; v2(11.836,-13.462) 11.836,-8.204 12.344,-7.696 R10.2
  Bottom Layer w0.508: v2(3.556,-13.462) v2(11.836,-13.462) ; R9.3@5.207,-22.504 R9.3
NetR41_1: R41.1 R42.1 | length 5.9
  Top Layer w0.508: R41.1 6.579,-6.883 6.96,-7.264 6.96,-9.169 7.163,-9.373 R42.1
NetR42_2: R42.2 U2.5 | length 15.1
  Top Layer w0.508: R42.2@10.439,-9.411 R42.2 v2@10.478,-10.846 ; v2@12.878,-2.921 v2@13.005,-2.794 ; v2(13.005,-2.921) v2@13.005,-2.794 ; U2.5 13.386,-1.499 13.005,-1.88 v2@13.005,-2.794
  Bottom Layer w0.508: v2@10.351,-11.139 12.153,-11.139 13.005,-10.287 v2(13.005,-2.921)
  other v2: 10.478,-11.227
VIN: D2.1 J2.2 R7.1 R22.1 | length 78.5
  Top Layer w0.508: R7.1 v2@31.376,-8.109 ; v2(37.694,-7.772) 37.694,23.444 40.564,26.314 J2.2@40.564,29.845 ; R22.1 v2@40.606,-8.077 ; v2(51.289,-17.704) v2(51.289,-12.268) v2@51.289,-12.167 ; v2(56.464,-17.704) D2.1
  Bottom Layer w0.508: v2(31.376,-7.772) v2(37.694,-7.772) v2(40.615,-7.772) 50.8,-7.772 51.289,-8.262 v2(51.289,-12.268) ; v2(51.289,-17.704) v2(56.464,-17.704)
VUUT: C4.2 C5.1 D1.1 J4.11 R1.2 R3.2 U1.2 | length 133.8
  Top Layer w0.508: v2(22.51,-37.668) J4.11 ; R1.2 v2(24.193,-19.837) ; v2(34.722,-37.668) v2(34.722,-19.837) ; v2(47.447,-19.837) 47.447,-4.597 47.742,-4.303 R3.2 48.456,-0.389 49.936,1.092 49.936,9.246 50.343,9.652 U1.2@56.032,9.652 ; U1.2 U1.2@56.134,10.185
  Top Layer w1.27: C5.1 U1.2 ; U1.2@56.134,10.185 59.969,10.185 60.464,9.691 D1.1
  Bottom Layer w0.508: v2(22.51,-37.668) v2(34.722,-37.668) ; v2(24.193,-19.837) v2(34.722,-19.837) v2(47.447,-19.837)
  other v1: 45.504,7.569 47.479,7.569 49.454,7.569 51.429,7.569 60.808,7.569 62.782,7.569 45.504,9.423 47.479,9.423 49.454,9.423 51.429,9.423 60.808,9.423 62.782,9.423 45.504,11.354 47.479,11.354 49.454,11.354 51.429,11.354 60.808,11.354 62.782,11.354 45.504,13.132 47.479,13.132 49.454,13.132 51.429,13.132 60.808,13.132 62.782,13.132 45.855,16.307 47.883,16.307 49.911,16.307 51.939,16.307 53.967,16.307 55.994,16.307 58.022,16.307 60.05,16.307 62.078,16.307 45.855,18.258 47.883,18.258 49.911,18.258 51.939,18.258 53.967,18.258 55.994,18.258 58.022,18.258 60.05,18.258 62.078,18.258 45.855,20.209 47.883,20.209 49.911,20.209 51.939,20.209 53.967,20.209 55.994,20.209 58.022,20.209 60.05,20.209 62.078,20.209 45.855,22.16 47.883,22.16 49.911,22.16 51.939,22.16 53.967,22.16 55.994,22.16 58.022,22.16 60.05,22.16 62.078,22.16 45.855,24.112 47.883,24.112 49.911,24.112 51.939,24.112 53.967,24.112 55.994,24.112 58.022,24.112 60.05,24.112 62.078,24.112 45.855,26.063 47.883,26.063 49.911,26.063 51.939,26.063 53.967,26.063 55.994,26.063 58.022,26.063 60.05,26.063 62.078,26.063 45.855,28.014 47.883,28.014 49.911,28.014 51.939,28.014 53.967,28.014 55.994,28.014 58.022,28.014 60.05,28.014 62.078,28.014 45.855,29.965 47.883,29.965 49.911,29.965 51.939,29.965 53.967,29.965 55.994,29.965 58.022,29.965 60.05,29.965 62.078,29.965 45.855,31.916 47.883,31.916 49.911,31.916 51.939,31.916 53.967,31.916 55.994,31.916 58.022,31.916 60.05,31.916 62.078,31.916 45.855,33.867 47.883,33.867 49.911,33.867 51.939,33.867 53.967,33.867 55.994,33.867 58.022,33.867 60.05,33.867 62.078,33.867 47.883,35.819 49.911,35.819 51.939,35.819 53.967,35.819 55.994,35.819 58.022,35.819 60.05,35.819 62.078,35.819 47.883,37.77 49.911,37.77 51.939,37.77 53.967,37.77 55.994,37.77 58.022,37.77 60.05,37.77 62.078,37.77
pads on no net: J1. J1.10 J2.MP1 J2.MP2 J3.0 J4.0 J4.12 J4.14 J5.0 U3.1 U3.2 U3.6 U3.7 U3.8

## Polygon pours and split planes (outlines as drawn)
GND on Top Layer "GND-Top" (solid, remove dead copper, pour order 4): -0.5,40.5 -0.5,-40 65,-40 65,40.5
GND on Bottom Layer "GND-Bottom" (solid, remove dead copper, pour order 10): -0.5,40.5 -0.5,-40 65,-40 65,40.5

## Keep-outs
Keep-Out Layer:
  lines w0.127: 2.564,-39.496 cw(c2.564,-37.431) 0.5,-37.431 0.5,37.441 cw(c2.564,37.441) 2.564,39.505 ; 2.564,-39.495 62.436,-39.495 ccw(c62.436,-37.43) 64.5,-37.43 ; 2.564,39.505 62.436,39.505 ; 62.436,39.505 cw(c62.436,37.441) 64.5,37.441 64.5,-37.431

## Other copper
Top Layer:
  rectangle net VUUT: 46.736,5.334 63.856,38.659
  region net VUUT: 46.736,35.052 44.196,35.052 44.196,5.334 46.736,5.334
  pour cut-out: 6.375,-25.6 6.375,-17.428 27.08,-17.428 27.08,-25.6
Bottom Layer:
  rectangle net VUUT: 46.736,5.334 63.856,38.659
  region net VUUT: 46.736,35.052 44.196,35.052 44.196,5.334 46.736,5.334
  pour cut-out: 7.7,-24.287 7.7,-32.458 22.5,-32.458 22.5,-24.287
  pour cut-out: 37.4,-24.287 37.4,-32.458 31.952,-32.458 31.95,-32.456 31.95,-28.05 34.875,-28.05 34.875,-24.275

## Silkscreen, mask and mechanical layers (free items; w line width, h text height)
Top Overlay:
  drawing of 889 lines, arcs and shapes, not listed
  text "31-05-21" at 29.606,14.424 h1.4
Mechanical 4:
  lines w0.127: 65,-37.495 cw(c62.5,-37.495) 62.5,-39.995 ; 0,-37.495 ccw(c2.5,-37.495) 2.5,-39.995 ; 0,-37.495 ccw(c2.5,-37.495) 2.5,-39.995 ; 0,-37.495 0,37.505 cw(c2.5,37.505) 2.5,40.005 62.5,40.005 cw(c62.5,37.505) 65,37.505 65,-37.495 cw(c62.5,-37.495) 62.5,-39.995 ; 2.5,-39.995 62.5,-39.995 ; 2.5,-39.995 62.5,-39.995

## Text inside footprints (layer, text, board x,y; h text height)
J3: Bottom Overlay "10" at 7.587,-25.688 h0.51; Bottom Overlay "1" at 22.837,-30.018 h0.51
J4: Top Overlay "14" at 26.76,-26.368 h0.51; Top Overlay "1" at 6.452,-31.928 h0.51
J5: Bottom Overlay "4" at 32.062,-25.438 h0.51; Bottom Overlay "1" at 38.142,-30.018 h0.51